# Altium PCB Insole_ver1_42.PcbDoc (part 1 of 3)
Units mm, origin at the board's own origin, x right, y up, seen from the top; angles counter-clockwise.
Board outline 154.9 x 260.57 mm, 2 copper layers (Top Layer, Bottom Layer); 254 components, 50 nets, 803 pads, 0 vias.
Unrouted connection lines stored in the file: 477.
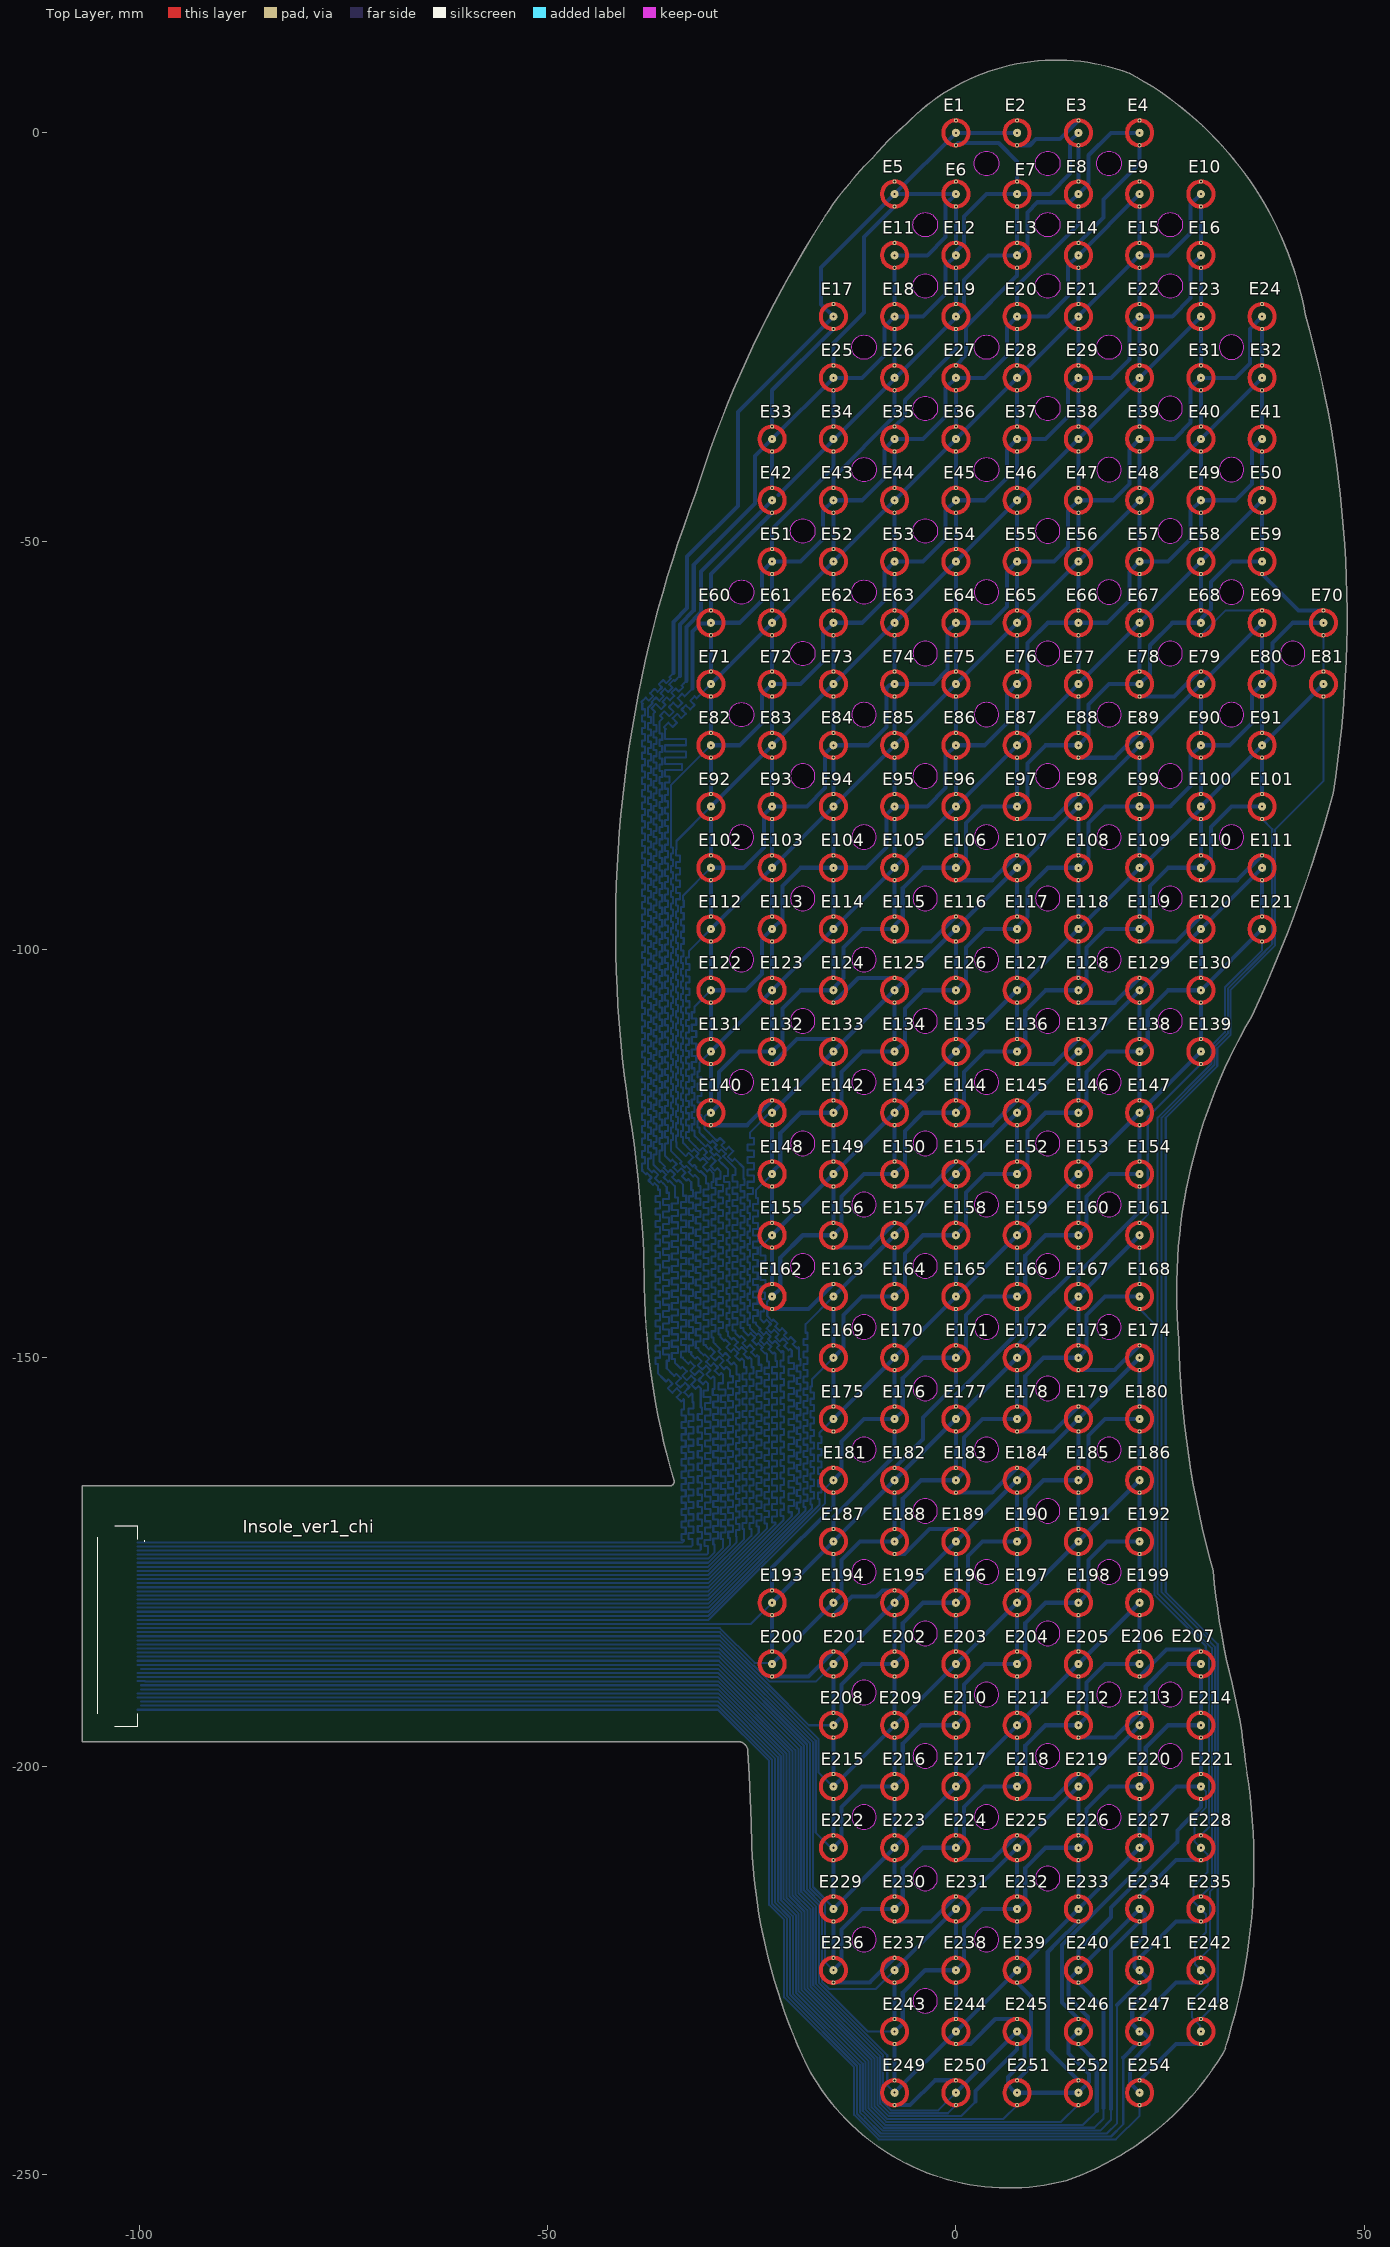
[diagram p0: Top Layer view]
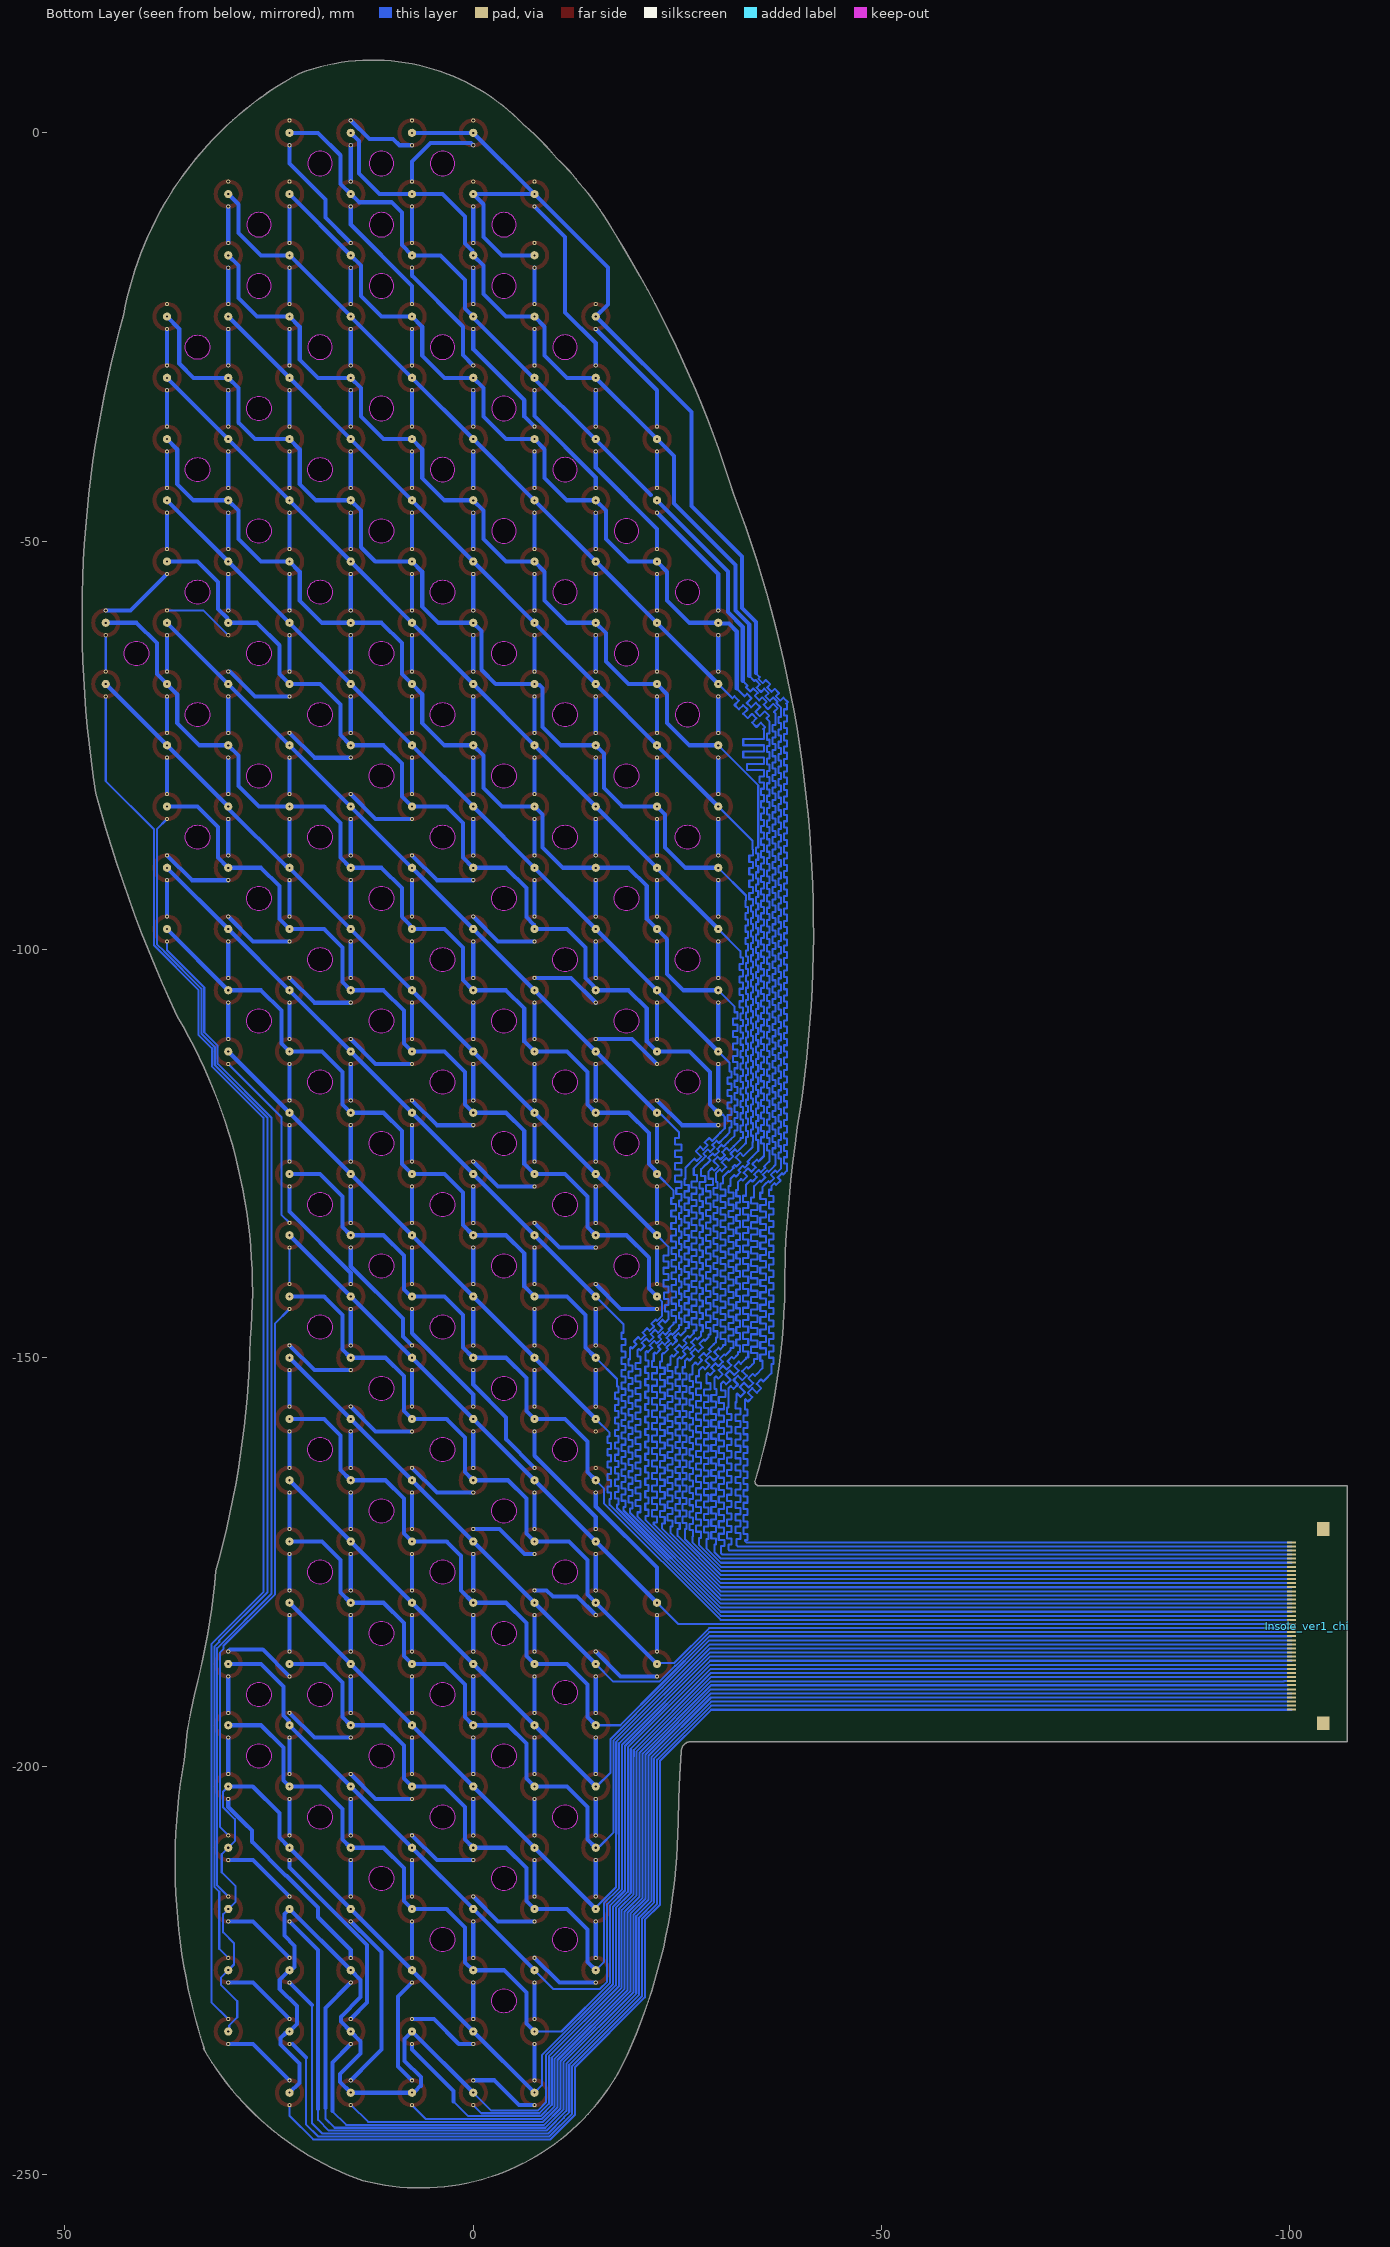
[diagram p1: Bottom Layer view, seen from below]

## Layer stack, top to bottom
Top Solder: solder mask 0.0102, Solder Resist, Dk 3.5
Top Layer: signal copper 0.0356
Dielectric 1: dielectric 0.32, FR-4, Dk 4.8
Bottom Layer: signal copper 0.0356
Bottom Solder: solder mask 0.0102, Solder Resist, Dk 3.5

## Board outline
-26.688,-197 cw(c-26.688,-198.216) -25.472,-198.216 cw(c-324.889,-216.319) -24.997,-209.744 ccw(c44.561,-206.575) -18.246,-236.636 ccw(c6.5,-223.767) 13.5,-250.767 ccw(c1.651,-216.562) 33.078,-234.527 32.957,-234.593 ccw(c-37.418,-211.967) 35.41,-199.289 ccw(c-21.756,-204.191) 33.82,-189.934 cw(c123.348,-167.938) 31.518,-176.091 cw(c141.929,-145.126) 27.287,-147.697 cw(c93.136,-141.857) 36.225,-108.222 ccw(c-115.088,-37.469) 46.211,-80.88 ccw(c-89.6,-59.362) 42.805,-22.261 ccw(c1.326,-29.86) 21.234,7.314 ccw(c12.343,-16.668) -6.147,1.004 ccw(c13.814,-22.782) -10.2,-3.097 ccw(c4.457,-19.243) -13.019,-6.2 ccw(c7.586,-24.741) -16.388,-10.827 ccw(c99.541,-84.886) -31.897,-44.287 -31.891,-44.289 ccw(c108,-97.5) -39.7,-121.7 cw(c-230.71,-148.248) -38.193,-136.988 -38.2,-137 ccw(c-1.9,-137.6) -38.158,-139.454 -38.171,-139.702 ccw(c51.015,-139.776) -34.5,-165.1 cw(c-35.05,-165.15) -35,-165.7 -107,-165.7 -107,-197
cut-out: -5.25,-198.75 ccw(c-3.75,-198.75) -3.75,-200.25 ccw(c-3.75,-198.75) -2.25,-198.75 ccw(c-3.75,-198.75) -3.75,-197.25 ccw(c-3.75,-198.75)
cut-out: -12.75,-206.25 ccw(c-11.25,-206.25) -11.25,-207.75 ccw(c-11.25,-206.25) -9.75,-206.25 ccw(c-11.25,-206.25) -11.25,-204.75 ccw(c-11.25,-206.25)
cut-out: -5.25,-228.75 ccw(c-3.75,-228.75) -3.75,-230.25 ccw(c-3.75,-228.75) -2.25,-228.75 ccw(c-3.75,-228.75) -3.75,-227.25 ccw(c-3.75,-228.75)
cut-out: -5.25,-213.75 ccw(c-3.75,-213.75) -3.75,-215.25 ccw(c-3.75,-213.75) -2.25,-213.75 ccw(c-3.75,-213.75) -3.75,-212.25 ccw(c-3.75,-213.75)
cut-out: 2.25,-221.25 ccw(c3.75,-221.25) 3.75,-222.75 ccw(c3.75,-221.25) 5.25,-221.25 ccw(c3.75,-221.25) 3.75,-219.75 ccw(c3.75,-221.25)
cut-out: 9.75,-213.75 ccw(c11.25,-213.75) 11.25,-215.25 ccw(c11.25,-213.75) 12.75,-213.75 ccw(c11.25,-213.75) 11.25,-212.25 ccw(c11.25,-213.75)
cut-out: 9.75,-198.75 ccw(c11.25,-198.75) 11.25,-200.25 ccw(c11.25,-198.75) 12.75,-198.75 ccw(c11.25,-198.75) 11.25,-197.25 ccw(c11.25,-198.75)
cut-out: 2.25,-206.25 ccw(c3.75,-206.25) 3.75,-207.75 ccw(c3.75,-206.25) 5.25,-206.25 ccw(c3.75,-206.25) 3.75,-204.75 ccw(c3.75,-206.25)
cut-out: 17.25,-206.25 ccw(c18.75,-206.25) 18.75,-207.75 ccw(c18.75,-206.25) 20.25,-206.25 ccw(c18.75,-206.25) 18.75,-204.75 ccw(c18.75,-206.25)
cut-out: 24.75,-198.75 ccw(c26.25,-198.75) 26.25,-200.25 ccw(c26.25,-198.75) 27.75,-198.75 ccw(c26.25,-198.75) 26.25,-197.25 ccw(c26.25,-198.75)
cut-out: 24.75,-191.25 ccw(c26.25,-191.25) 26.25,-192.75 ccw(c26.25,-191.25) 27.75,-191.25 ccw(c26.25,-191.25) 26.25,-189.75 ccw(c26.25,-191.25)
cut-out: 17.25,-191.25 ccw(c18.75,-191.25) 18.75,-192.75 ccw(c18.75,-191.25) 20.25,-191.25 ccw(c18.75,-191.25) 18.75,-189.75 ccw(c18.75,-191.25)
cut-out: 2.25,-191.25 ccw(c3.75,-191.25) 3.75,-192.75 ccw(c3.75,-191.25) 5.25,-191.25 ccw(c3.75,-191.25) 3.75,-189.75 ccw(c3.75,-191.25)
cut-out: 9.75,-183.75 ccw(c11.25,-183.75) 11.25,-185.25 ccw(c11.25,-183.75) 12.75,-183.75 ccw(c11.25,-183.75) 11.25,-182.25 ccw(c11.25,-183.75)
cut-out: 17.25,-176.25 ccw(c18.75,-176.25) 18.75,-177.75 ccw(c18.75,-176.25) 20.25,-176.25 ccw(c18.75,-176.25) 18.75,-174.75 ccw(c18.75,-176.25)
cut-out: -5.25,-183.75 ccw(c-3.75,-183.75) -3.75,-185.25 ccw(c-3.75,-183.75) -2.25,-183.75 ccw(c-3.75,-183.75) -3.75,-182.25 ccw(c-3.75,-183.75)
cut-out: 2.25,-176.25 ccw(c3.75,-176.25) 3.75,-177.75 ccw(c3.75,-176.25) 5.25,-176.25 ccw(c3.75,-176.25) 3.75,-174.75 ccw(c3.75,-176.25)
cut-out: -12.75,-176.25 ccw(c-11.25,-176.25) -11.25,-177.75 ccw(c-11.25,-176.25) -9.75,-176.25 ccw(c-11.25,-176.25) -11.25,-174.75 ccw(c-11.25,-176.25)
cut-out: -5.25,-168.75 ccw(c-3.75,-168.75) -3.75,-170.25 ccw(c-3.75,-168.75) -2.25,-168.75 ccw(c-3.75,-168.75) -3.75,-167.25 ccw(c-3.75,-168.75)
cut-out: 9.75,-168.75 ccw(c11.25,-168.75) 11.25,-170.25 ccw(c11.25,-168.75) 12.75,-168.75 ccw(c11.25,-168.75) 11.25,-167.25 ccw(c11.25,-168.75)
cut-out: 17.25,-161.25 ccw(c18.75,-161.25) 18.75,-162.75 ccw(c18.75,-161.25) 20.25,-161.25 ccw(c18.75,-161.25) 18.75,-159.75 ccw(c18.75,-161.25)
cut-out: 2.25,-161.25 ccw(c3.75,-161.25) 3.75,-162.75 ccw(c3.75,-161.25) 5.25,-161.25 ccw(c3.75,-161.25) 3.75,-159.75 ccw(c3.75,-161.25)
cut-out: -12.75,-161.25 ccw(c-11.25,-161.25) -11.25,-162.75 ccw(c-11.25,-161.25) -9.75,-161.25 ccw(c-11.25,-161.25) -11.25,-159.75 ccw(c-11.25,-161.25)
cut-out: -5.25,-153.75 ccw(c-3.75,-153.75) -3.75,-155.25 ccw(c-3.75,-153.75) -2.25,-153.75 ccw(c-3.75,-153.75) -3.75,-152.25 ccw(c-3.75,-153.75)
cut-out: 9.75,-153.75 ccw(c11.25,-153.75) 11.25,-155.25 ccw(c11.25,-153.75) 12.75,-153.75 ccw(c11.25,-153.75) 11.25,-152.25 ccw(c11.25,-153.75)
cut-out: 17.25,-146.25 ccw(c18.75,-146.25) 18.75,-147.75 ccw(c18.75,-146.25) 20.25,-146.25 ccw(c18.75,-146.25) 18.75,-144.75 ccw(c18.75,-146.25)
cut-out: 2.25,-146.25 ccw(c3.75,-146.25) 3.75,-147.75 ccw(c3.75,-146.25) 5.25,-146.25 ccw(c3.75,-146.25) 3.75,-144.75 ccw(c3.75,-146.25)
cut-out: -12.75,-146.25 ccw(c-11.25,-146.25) -11.25,-147.75 ccw(c-11.25,-146.25) -9.75,-146.25 ccw(c-11.25,-146.25) -11.25,-144.75 ccw(c-11.25,-146.25)
cut-out: -20.25,-138.75 ccw(c-18.75,-138.75) -18.75,-140.25 ccw(c-18.75,-138.75) -17.25,-138.75 ccw(c-18.75,-138.75) -18.75,-137.25 ccw(c-18.75,-138.75)
cut-out: -5.25,-138.75 ccw(c-3.75,-138.75) -3.75,-140.25 ccw(c-3.75,-138.75) -2.25,-138.75 ccw(c-3.75,-138.75) -3.75,-137.25 ccw(c-3.75,-138.75)
cut-out: 9.75,-138.75 ccw(c11.25,-138.75) 11.25,-140.25 ccw(c11.25,-138.75) 12.75,-138.75 ccw(c11.25,-138.75) 11.25,-137.25 ccw(c11.25,-138.75)
cut-out: 17.25,-131.25 ccw(c18.75,-131.25) 18.75,-132.75 ccw(c18.75,-131.25) 20.25,-131.25 ccw(c18.75,-131.25) 18.75,-129.75 ccw(c18.75,-131.25)
cut-out: 2.25,-131.25 ccw(c3.75,-131.25) 3.75,-132.75 ccw(c3.75,-131.25) 5.25,-131.25 ccw(c3.75,-131.25) 3.75,-129.75 ccw(c3.75,-131.25)
cut-out: -12.75,-131.25 ccw(c-11.25,-131.25) -11.25,-132.75 ccw(c-11.25,-131.25) -9.75,-131.25 ccw(c-11.25,-131.25) -11.25,-129.75 ccw(c-11.25,-131.25)
cut-out: -20.25,-123.75 ccw(c-18.75,-123.75) -18.75,-125.25 ccw(c-18.75,-123.75) -17.25,-123.75 ccw(c-18.75,-123.75) -18.75,-122.25 ccw(c-18.75,-123.75)
cut-out: -5.25,-123.75 ccw(c-3.75,-123.75) -3.75,-125.25 ccw(c-3.75,-123.75) -2.25,-123.75 ccw(c-3.75,-123.75) -3.75,-122.25 ccw(c-3.75,-123.75)
cut-out: 9.75,-123.75 ccw(c11.25,-123.75) 11.25,-125.25 ccw(c11.25,-123.75) 12.75,-123.75 ccw(c11.25,-123.75) 11.25,-122.25 ccw(c11.25,-123.75)
cut-out: 17.25,-116.25 ccw(c18.75,-116.25) 18.75,-117.75 ccw(c18.75,-116.25) 20.25,-116.25 ccw(c18.75,-116.25) 18.75,-114.75 ccw(c18.75,-116.25)
cut-out: 2.25,-116.25 ccw(c3.75,-116.25) 3.75,-117.75 ccw(c3.75,-116.25) 5.25,-116.25 ccw(c3.75,-116.25) 3.75,-114.75 ccw(c3.75,-116.25)
cut-out: -12.75,-116.25 ccw(c-11.25,-116.25) -11.25,-117.75 ccw(c-11.25,-116.25) -9.75,-116.25 ccw(c-11.25,-116.25) -11.25,-114.75 ccw(c-11.25,-116.25)
cut-out: -27.75,-116.25 ccw(c-26.25,-116.25) -26.25,-117.75 ccw(c-26.25,-116.25) -24.75,-116.25 ccw(c-26.25,-116.25) -26.25,-114.75 ccw(c-26.25,-116.25)
cut-out: -20.25,-108.75 ccw(c-18.75,-108.75) -18.75,-110.25 ccw(c-18.75,-108.75) -17.25,-108.75 ccw(c-18.75,-108.75) -18.75,-107.25 ccw(c-18.75,-108.75)
cut-out: -5.25,-108.75 ccw(c-3.75,-108.75) -3.75,-110.25 ccw(c-3.75,-108.75) -2.25,-108.75 ccw(c-3.75,-108.75) -3.75,-107.25 ccw(c-3.75,-108.75)
cut-out: 9.75,-108.75 ccw(c11.25,-108.75) 11.25,-110.25 ccw(c11.25,-108.75) 12.75,-108.75 ccw(c11.25,-108.75) 11.25,-107.25 ccw(c11.25,-108.75)
cut-out: 24.75,-108.75 ccw(c26.25,-108.75) 26.25,-110.25 ccw(c26.25,-108.75) 27.75,-108.75 ccw(c26.25,-108.75) 26.25,-107.25 ccw(c26.25,-108.75)
cut-out: 17.25,-101.25 ccw(c18.75,-101.25) 18.75,-102.75 ccw(c18.75,-101.25) 20.25,-101.25 ccw(c18.75,-101.25) 18.75,-99.75 ccw(c18.75,-101.25)
cut-out: 2.25,-101.25 ccw(c3.75,-101.25) 3.75,-102.75 ccw(c3.75,-101.25) 5.25,-101.25 ccw(c3.75,-101.25) 3.75,-99.75 ccw(c3.75,-101.25)
cut-out: -12.75,-101.25 ccw(c-11.25,-101.25) -11.25,-102.75 ccw(c-11.25,-101.25) -9.75,-101.25 ccw(c-11.25,-101.25) -11.25,-99.75 ccw(c-11.25,-101.25)
cut-out: -27.75,-101.25 ccw(c-26.25,-101.25) -26.25,-102.75 ccw(c-26.25,-101.25) -24.75,-101.25 ccw(c-26.25,-101.25) -26.25,-99.75 ccw(c-26.25,-101.25)
cut-out: -20.25,-93.75 ccw(c-18.75,-93.75) -18.75,-95.25 ccw(c-18.75,-93.75) -17.25,-93.75 ccw(c-18.75,-93.75) -18.75,-92.25 ccw(c-18.75,-93.75)
cut-out: -5.25,-93.75 ccw(c-3.75,-93.75) -3.75,-95.25 ccw(c-3.75,-93.75) -2.25,-93.75 ccw(c-3.75,-93.75) -3.75,-92.25 ccw(c-3.75,-93.75)
cut-out: 9.75,-93.75 ccw(c11.25,-93.75) 11.25,-95.25 ccw(c11.25,-93.75) 12.75,-93.75 ccw(c11.25,-93.75) 11.25,-92.25 ccw(c11.25,-93.75)
cut-out: 24.75,-93.75 ccw(c26.25,-93.75) 26.25,-95.25 ccw(c26.25,-93.75) 27.75,-93.75 ccw(c26.25,-93.75) 26.25,-92.25 ccw(c26.25,-93.75)
cut-out: 32.25,-86.25 ccw(c33.75,-86.25) 33.75,-87.75 ccw(c33.75,-86.25) 35.25,-86.25 ccw(c33.75,-86.25) 33.75,-84.75 ccw(c33.75,-86.25)
cut-out: 17.25,-86.25 ccw(c18.75,-86.25) 18.75,-87.75 ccw(c18.75,-86.25) 20.25,-86.25 ccw(c18.75,-86.25) 18.75,-84.75 ccw(c18.75,-86.25)
cut-out: 2.25,-86.25 ccw(c3.75,-86.25) 3.75,-87.75 ccw(c3.75,-86.25) 5.25,-86.25 ccw(c3.75,-86.25) 3.75,-84.75 ccw(c3.75,-86.25)
cut-out: -5.25,-78.75 ccw(c-3.75,-78.75) -3.75,-80.25 ccw(c-3.75,-78.75) -2.25,-78.75 ccw(c-3.75,-78.75) -3.75,-77.25 ccw(c-3.75,-78.75)
cut-out: -12.75,-86.25 ccw(c-11.25,-86.25) -11.25,-87.75 ccw(c-11.25,-86.25) -9.75,-86.25 ccw(c-11.25,-86.25) -11.25,-84.75 ccw(c-11.25,-86.25)
cut-out: -27.75,-86.25 ccw(c-26.25,-86.25) -26.25,-87.75 ccw(c-26.25,-86.25) -24.75,-86.25 ccw(c-26.25,-86.25) -26.25,-84.75 ccw(c-26.25,-86.25)
cut-out: -20.25,-78.75 ccw(c-18.75,-78.75) -18.75,-80.25 ccw(c-18.75,-78.75) -17.25,-78.75 ccw(c-18.75,-78.75) -18.75,-77.25 ccw(c-18.75,-78.75)
cut-out: -26.25,-72.75 cw(c-26.25,-71.25) -27.75,-71.25 cw(c-26.25,-71.25) -26.25,-69.75 cw(c-26.25,-71.25) -24.75,-71.25 cw(c-26.25,-71.25)
cut-out: -26.25,-57.75 cw(c-26.25,-56.25) -27.75,-56.25 cw(c-26.25,-56.25) -26.25,-54.75 cw(c-26.25,-56.25) -24.75,-56.25 cw(c-26.25,-56.25)
cut-out: -12.75,-71.25 ccw(c-11.25,-71.25) -11.25,-72.75 ccw(c-11.25,-71.25) -9.75,-71.25 ccw(c-11.25,-71.25) -11.25,-69.75 ccw(c-11.25,-71.25)
cut-out: 32.25,-71.25 ccw(c33.75,-71.25) 33.75,-72.75 ccw(c33.75,-71.25) 35.25,-71.25 ccw(c33.75,-71.25) 33.75,-69.75 ccw(c33.75,-71.25)
cut-out: 39.75,-63.75 ccw(c41.25,-63.75) 41.25,-65.25 ccw(c41.25,-63.75) 42.75,-63.75 ccw(c41.25,-63.75) 41.25,-62.25 ccw(c41.25,-63.75)
cut-out: 24.75,-63.75 ccw(c26.25,-63.75) 26.25,-65.25 ccw(c26.25,-63.75) 27.75,-63.75 ccw(c26.25,-63.75) 26.25,-62.25 ccw(c26.25,-63.75)
cut-out: -5.25,-63.75 ccw(c-3.75,-63.75) -3.75,-65.25 ccw(c-3.75,-63.75) -2.25,-63.75 ccw(c-3.75,-63.75) -3.75,-62.25 ccw(c-3.75,-63.75)
cut-out: -18.75,-65.25 cw(c-18.75,-63.75) -20.25,-63.75 cw(c-18.75,-63.75) -18.75,-62.25 cw(c-18.75,-63.75) -17.25,-63.75 cw(c-18.75,-63.75)
cut-out: -11.25,-57.75 cw(c-11.25,-56.25) -12.75,-56.25 cw(c-11.25,-56.25) -11.25,-54.75 cw(c-11.25,-56.25) -9.75,-56.25 cw(c-11.25,-56.25)
cut-out: 2.25,-56.25 ccw(c3.75,-56.25) 3.75,-57.75 ccw(c3.75,-56.25) 5.25,-56.25 ccw(c3.75,-56.25) 3.75,-54.75 ccw(c3.75,-56.25)
cut-out: 9.75,-48.75 ccw(c11.25,-48.75) 11.25,-50.25 ccw(c11.25,-48.75) 12.75,-48.75 ccw(c11.25,-48.75) 11.25,-47.25 ccw(c11.25,-48.75)
cut-out: -3.75,-50.25 cw(c-3.75,-48.75) -5.25,-48.75 cw(c-3.75,-48.75) -3.75,-47.25 cw(c-3.75,-48.75) -2.25,-48.75 cw(c-3.75,-48.75)
cut-out: -18.75,-50.25 cw(c-18.75,-48.75) -20.25,-48.75 cw(c-18.75,-48.75) -18.75,-47.25 cw(c-18.75,-48.75) -17.25,-48.75 cw(c-18.75,-48.75)
cut-out: -11.25,-42.75 cw(c-11.25,-41.25) -12.75,-41.25 cw(c-11.25,-41.25) -11.25,-39.75 cw(c-11.25,-41.25) -9.75,-41.25 cw(c-11.25,-41.25)
cut-out: 3.75,-42.75 cw(c3.75,-41.25) 2.25,-41.25 cw(c3.75,-41.25) 3.75,-39.75 cw(c3.75,-41.25) 5.25,-41.25 cw(c3.75,-41.25)
cut-out: 17.25,-41.25 ccw(c18.75,-41.25) 18.75,-42.75 ccw(c18.75,-41.25) 20.25,-41.25 ccw(c18.75,-41.25) 18.75,-39.75 ccw(c18.75,-41.25)
cut-out: 32.25,-41.25 ccw(c33.75,-41.25) 33.75,-42.75 ccw(c33.75,-41.25) 35.25,-41.25 ccw(c33.75,-41.25) 33.75,-39.75 ccw(c33.75,-41.25)
cut-out: 24.75,-48.75 ccw(c26.25,-48.75) 26.25,-50.25 ccw(c26.25,-48.75) 27.75,-48.75 ccw(c26.25,-48.75) 26.25,-47.25 ccw(c26.25,-48.75)
cut-out: 32.25,-56.25 ccw(c33.75,-56.25) 33.75,-57.75 ccw(c33.75,-56.25) 35.25,-56.25 ccw(c33.75,-56.25) 33.75,-54.75 ccw(c33.75,-56.25)
cut-out: 17.25,-56.25 ccw(c18.75,-56.25) 18.75,-57.75 ccw(c18.75,-56.25) 20.25,-56.25 ccw(c18.75,-56.25) 18.75,-54.75 ccw(c18.75,-56.25)
cut-out: 9.75,-63.75 ccw(c11.25,-63.75) 11.25,-65.25 ccw(c11.25,-63.75) 12.75,-63.75 ccw(c11.25,-63.75) 11.25,-62.25 ccw(c11.25,-63.75)
cut-out: 2.25,-71.25 ccw(c3.75,-71.25) 3.75,-72.75 ccw(c3.75,-71.25) 5.25,-71.25 ccw(c3.75,-71.25) 3.75,-69.75 ccw(c3.75,-71.25)
cut-out: 9.75,-78.75 ccw(c11.25,-78.75) 11.25,-80.25 ccw(c11.25,-78.75) 12.75,-78.75 ccw(c11.25,-78.75) 11.25,-77.25 ccw(c11.25,-78.75)
cut-out: 24.75,-78.75 ccw(c26.25,-78.75) 26.25,-80.25 ccw(c26.25,-78.75) 27.75,-78.75 ccw(c26.25,-78.75) 26.25,-77.25 ccw(c26.25,-78.75)
cut-out: 17.25,-71.25 ccw(c18.75,-71.25) 18.75,-72.75 ccw(c18.75,-71.25) 20.25,-71.25 ccw(c18.75,-71.25) 18.75,-69.75 ccw(c18.75,-71.25)
cut-out: -12.75,-221.25 ccw(c-11.25,-221.25) -11.25,-222.75 ccw(c-11.25,-221.25) -9.75,-221.25 ccw(c-11.25,-221.25) -11.25,-219.75 ccw(c-11.25,-221.25)
cut-out: 24.75,-33.75 ccw(c26.25,-33.75) 26.25,-35.25 ccw(c26.25,-33.75) 27.75,-33.75 ccw(c26.25,-33.75) 26.25,-32.25 ccw(c26.25,-33.75)
cut-out: 11.25,-35.25 cw(c11.25,-33.75) 9.75,-33.75 cw(c11.25,-33.75) 11.25,-32.25 cw(c11.25,-33.75) 12.75,-33.75 cw(c11.25,-33.75)
cut-out: -3.75,-35.25 cw(c-3.75,-33.75) -5.25,-33.75 cw(c-3.75,-33.75) -3.75,-32.25 cw(c-3.75,-33.75) -2.25,-33.75 cw(c-3.75,-33.75)
cut-out: -11.25,-27.75 cw(c-11.25,-26.25) -12.75,-26.25 cw(c-11.25,-26.25) -11.25,-24.75 cw(c-11.25,-26.25) -9.75,-26.25 cw(c-11.25,-26.25)
cut-out: 3.75,-27.75 cw(c3.75,-26.25) 2.25,-26.25 cw(c3.75,-26.25) 3.75,-24.75 cw(c3.75,-26.25) 5.25,-26.25 cw(c3.75,-26.25)
cut-out: 18.75,-27.75 cw(c18.75,-26.25) 17.25,-26.25 cw(c18.75,-26.25) 18.75,-24.75 cw(c18.75,-26.25) 20.25,-26.25 cw(c18.75,-26.25)
cut-out: 32.25,-26.25 ccw(c33.75,-26.25) 33.75,-27.75 ccw(c33.75,-26.25) 35.25,-26.25 ccw(c33.75,-26.25) 33.75,-24.75 ccw(c33.75,-26.25)
cut-out: 26.25,-20.25 cw(c26.25,-18.75) 24.75,-18.75 cw(c26.25,-18.75) 26.25,-17.25 cw(c26.25,-18.75) 27.75,-18.75 cw(c26.25,-18.75)
cut-out: -3.75,-20.25 cw(c-3.75,-18.75) -5.25,-18.75 cw(c-3.75,-18.75) -3.75,-17.25 cw(c-3.75,-18.75) -2.25,-18.75 cw(c-3.75,-18.75)
cut-out: 11.25,-20.25 cw(c11.25,-18.75) 9.75,-18.75 cw(c11.25,-18.75) 11.25,-17.25 cw(c11.25,-18.75) 12.75,-18.75 cw(c11.25,-18.75)
cut-out: 11.25,-12.75 cw(c11.25,-11.25) 9.75,-11.25 cw(c11.25,-11.25) 11.25,-9.75 cw(c11.25,-11.25) 12.75,-11.25 cw(c11.25,-11.25)
cut-out: 26.25,-12.75 cw(c26.25,-11.25) 24.75,-11.25 cw(c26.25,-11.25) 26.25,-9.75 cw(c26.25,-11.25) 27.75,-11.25 cw(c26.25,-11.25)
cut-out: 18.75,-5.25 cw(c18.75,-3.75) 17.25,-3.75 cw(c18.75,-3.75) 18.75,-2.25 cw(c18.75,-3.75) 20.25,-3.75 cw(c18.75,-3.75)
cut-out: 11.25,-5.25 cw(c11.25,-3.75) 9.75,-3.75 cw(c11.25,-3.75) 11.25,-2.25 cw(c11.25,-3.75) 12.75,-3.75 cw(c11.25,-3.75)
cut-out: -3.75,-12.75 cw(c-3.75,-11.25) -5.25,-11.25 cw(c-3.75,-11.25) -3.75,-9.75 cw(c-3.75,-11.25) -2.25,-11.25 cw(c-3.75,-11.25)
cut-out: -12.75,-191 ccw(c-11.25,-191) -11.25,-192.5 ccw(c-11.25,-191) -9.75,-191 ccw(c-11.25,-191) -11.25,-189.5 ccw(c-11.25,-191)
cut-out: -12.75,-191 ccw(c-11.25,-191) -11.25,-192.5 ccw(c-11.25,-191) -9.75,-191 ccw(c-11.25,-191) -11.25,-189.5 ccw(c-11.25,-191)
cut-out: 3.75,-5.25 cw(c3.75,-3.75) 2.25,-3.75 cw(c3.75,-3.75) 3.75,-2.25 cw(c3.75,-3.75) 5.25,-3.75 cw(c3.75,-3.75)

## Design rules (kind name [scope] priority, off if disabled: settings)
Clearance [All] p1: gap=0.254 ignorepadtopadclearanceinfootprint=FALSE except(0: Arc-Hole Track-Hole SMDPad-Hole THPad-Hole Via-Hole Fill-Hole Poly-Hole Region-Hole Text-Hole; 0.102: Arc-Arc Arc-Track Track-Track)
DiffPairsRouting [All] p1: maxlimit=0.254 minlimit=0.254 mostfreqgap=0.254 toplayer_minwidth=0.381 toplayer_maxwidth=0.381 toplayer_prefwidth=0.381 bottomlayer_minwidth=0.381 bottomlayer_maxwidth=0.381 bottomlayer_prefwidth=0.381 substack1={6D9DD50E-99D7-4FCE-B177-F3C0DD92A880} toplayer_{6d9dd50e-99d7-4fce-b177-f3c0dd92a880}_minwidth=0.381 toplayer_{6d9dd50e-99d7-4fce-b177-f3c0dd92a880}_maxwidth=0.381 toplayer_{6d9dd50e-99d7-4fce-b177-f3c0dd92a880}_prefwidth=0.381 bottomlayer_{6d9dd50e-99d7-4fce-b177-f3c0dd92a880}_minwidth=0.381 bottomlayer_{6d9dd50e-99d7-4fce-b177-f3c0dd92a880}_maxwidth=0.381 bottomlayer_{6d9dd50e-99d7-4fce-b177-f3c0dd92a880}_prefwidth=0.381 maxuncoupledlength=12.7
PolygonConnect [All] p1: connectstyle=Relief reliefconductorwidth=0.254 reliefentries=4 polygonreliefangle="90 Angle" airgapwidth=0.254
RoutingVias [All] p1: holewidth=0.711 width=1.27 viastyle="Through Hole" minholewidth=0.711 minwidth=1.27 maxholewidth=0.711 maxwidth=1.27
SolderMaskExpansion [All] p1: expansion=0.102 istentingtop=FALSE
Width [All] p1: maxlimit=0.254 minlimit=0.254 preferedwidth=0.254 substack1={6D9DD50E-99D7-4FCE-B177-F3C0DD92A880}
29 further rules are at their usual default settings.

## Classes and differential pairs
net class ROUTE: Col1 Col2 Col3 Col4 Col5 Col6 Col7 Col8 Col9 Col10 Col11 Col12 Col13 Col14 Col15 Col16 Col17 Col18 Row1 Row2 Row3 Row4 Row5 Row6 Row7 Row8 Row9 Row10 Row11 Row12 Row13 Row14 Row15 Row16 Row17 Row18 Row19 Row20 Row21 Row22 Row23 Row24 Row25 Row26 Row27 Row28 Row29 Row30 Row31 Row32

## Components (designator, comment, footprint, x,y, rotation, side; value= is the part's Value field where it differs from the comment)
E1 "Insole_electrode_v1" insole_electrode_v1 0,0 r0 top
E2 "Insole_electrode_v1" insole_electrode_v1 7.5,0 r0 top
E3 "Insole_electrode_v1" insole_electrode_v1 15,0 r0 top
E4 "Insole_electrode_v1" insole_electrode_v1 22.5,0 r0 top
E5 "Insole_electrode_v1" insole_electrode_v1 -7.5,-7.5 r0 top
E6 "Insole_electrode_v1" insole_electrode_v1 0,-7.5 r0 top
E7 "Insole_electrode_v1" insole_electrode_v1 7.5,-7.5 r0 top
E8 "Insole_electrode_v1" insole_electrode_v1 15,-7.5 r0 top
E9 "Insole_electrode_v1" insole_electrode_v1 22.5,-7.5 r0 top
E10 "Insole_electrode_v1" insole_electrode_v1 30,-7.5 r0 top
E11 "Insole_electrode_v1" insole_electrode_v1 -7.5,-15 r0 top
E12 "Insole_electrode_v1" insole_electrode_v1 0,-15 r0 top
E13 "Insole_electrode_v1" insole_electrode_v1 7.5,-15 r0 top
E14 "Insole_electrode_v1" insole_electrode_v1 15,-15 r0 top
E15 "Insole_electrode_v1" insole_electrode_v1 22.5,-15 r0 top
E16 "Insole_electrode_v1" insole_electrode_v1 30,-15 r0 top
E17 "Insole_electrode_v1" insole_electrode_v1 -15,-22.5 r0 top
E18 "Insole_electrode_v1" insole_electrode_v1 -7.5,-22.5 r0 top
E19 "Insole_electrode_v1" insole_electrode_v1 0,-22.5 r0 top
E20 "Insole_electrode_v1" insole_electrode_v1 7.5,-22.5 r0 top
E21 "Insole_electrode_v1" insole_electrode_v1 15,-22.5 r0 top
E22 "Insole_electrode_v1" insole_electrode_v1 22.5,-22.5 r0 top
E23 "Insole_electrode_v1" insole_electrode_v1 30,-22.5 r0 top
E24 "Insole_electrode_v1" insole_electrode_v1 37.5,-22.5 r0 top
E25 "Insole_electrode_v1" insole_electrode_v1 -15,-30 r0 top
E26 "Insole_electrode_v1" insole_electrode_v1 -7.5,-30 r0 top
E27 "Insole_electrode_v1" insole_electrode_v1 0,-30 r0 top
E28 "Insole_electrode_v1" insole_electrode_v1 7.5,-30 r0 top
E29 "Insole_electrode_v1" insole_electrode_v1 15,-30 r0 top
E30 "Insole_electrode_v1" insole_electrode_v1 22.5,-30 r0 top
E31 "Insole_electrode_v1" insole_electrode_v1 30,-30 r0 top
E32 "Insole_electrode_v1" insole_electrode_v1 37.5,-30 r0 top
E33 "Insole_electrode_v1" insole_electrode_v1 -22.5,-37.5 r0 top
E34 "Insole_electrode_v1" insole_electrode_v1 -15,-37.5 r0 top
E35 "Insole_electrode_v1" insole_electrode_v1 -7.5,-37.5 r0 top
E36 "Insole_electrode_v1" insole_electrode_v1 0,-37.5 r0 top
E37 "Insole_electrode_v1" insole_electrode_v1 7.5,-37.5 r0 top
E38 "Insole_electrode_v1" insole_electrode_v1 15,-37.5 r0 top
E39 "Insole_electrode_v1" insole_electrode_v1 22.5,-37.5 r0 top
E40 "Insole_electrode_v1" insole_electrode_v1 30,-37.5 r0 top
E41 "Insole_electrode_v1" insole_electrode_v1 37.5,-37.5 r0 top
E42 "Insole_electrode_v1" insole_electrode_v1 -22.5,-45 r0 top
E43 "Insole_electrode_v1" insole_electrode_v1 -15,-45 r0 top
E44 "Insole_electrode_v1" insole_electrode_v1 -7.5,-45 r0 top
E45 "Insole_electrode_v1" insole_electrode_v1 0,-45 r0 top
E46 "Insole_electrode_v1" insole_electrode_v1 7.5,-45 r0 top
E47 "Insole_electrode_v1" insole_electrode_v1 15,-45 r0 top
E48 "Insole_electrode_v1" insole_electrode_v1 22.5,-45 r0 top
E49 "Insole_electrode_v1" insole_electrode_v1 30,-45 r0 top
E50 "Insole_electrode_v1" insole_electrode_v1 37.5,-45 r0 top
E51 "Insole_electrode_v1" insole_electrode_v1 -22.5,-52.5 r0 top
E52 "Insole_electrode_v1" insole_electrode_v1 -15,-52.5 r0 top
E53 "Insole_electrode_v1" insole_electrode_v1 -7.5,-52.5 r0 top
E54 "Insole_electrode_v1" insole_electrode_v1 0,-52.5 r0 top
E55 "Insole_electrode_v1" insole_electrode_v1 7.5,-52.5 r0 top
E56 "Insole_electrode_v1" insole_electrode_v1 15,-52.5 r0 top
E57 "Insole_electrode_v1" insole_electrode_v1 22.5,-52.5 r0 top
E58 "Insole_electrode_v1" insole_electrode_v1 30,-52.5 r0 top
E59 "Insole_electrode_v1" insole_electrode_v1 37.5,-52.5 r0 top
E60 "Insole_electrode_v1" insole_electrode_v1 -30,-60 r0 top
E61 "Insole_electrode_v1" insole_electrode_v1 -22.5,-60 r0 top
E62 "Insole_electrode_v1" insole_electrode_v1 -15,-60 r0 top
E63 "Insole_electrode_v1" insole_electrode_v1 -7.5,-60 r0 top
E64 "Insole_electrode_v1" insole_electrode_v1 0,-60 r0 top
E65 "Insole_electrode_v1" insole_electrode_v1 7.5,-60 r0 top
E66 "Insole_electrode_v1" insole_electrode_v1 15,-60 r0 top
E67 "Insole_electrode_v1" insole_electrode_v1 22.5,-60 r0 top
E68 "Insole_electrode_v1" insole_electrode_v1 30,-60 r0 top
E69 "Insole_electrode_v1" insole_electrode_v1 37.5,-60 r0 top
E70 "Insole_electrode_v1" insole_electrode_v1 45,-60 r0 top
E71 "Insole_electrode_v1" insole_electrode_v1 -30,-67.5 r0 top
E72 "Insole_electrode_v1" insole_electrode_v1 -22.5,-67.5 r0 top
E73 "Insole_electrode_v1" insole_electrode_v1 -15,-67.5 r0 top
E74 "Insole_electrode_v1" insole_electrode_v1 -7.5,-67.5 r0 top
E75 "Insole_electrode_v1" insole_electrode_v1 0,-67.5 r0 top
E76 "Insole_electrode_v1" insole_electrode_v1 7.5,-67.5 r0 top
E77 "Insole_electrode_v1" insole_electrode_v1 15,-67.5 r0 top
E78 "Insole_electrode_v1" insole_electrode_v1 22.5,-67.5 r0 top
E79 "Insole_electrode_v1" insole_electrode_v1 30,-67.5 r0 top
E80 "Insole_electrode_v1" insole_electrode_v1 37.5,-67.5 r0 top
E81 "Insole_electrode_v1" insole_electrode_v1 45,-67.5 r0 top
E82 "Insole_electrode_v1" insole_electrode_v1 -30,-75 r0 top
E83 "Insole_electrode_v1" insole_electrode_v1 -22.5,-75 r0 top
E84 "Insole_electrode_v1" insole_electrode_v1 -15,-75 r0 top
E85 "Insole_electrode_v1" insole_electrode_v1 -7.5,-75 r0 top
E86 "Insole_electrode_v1" insole_electrode_v1 0,-75 r0 top
E87 "Insole_electrode_v1" insole_electrode_v1 7.5,-75 r0 top
E88 "Insole_electrode_v1" insole_electrode_v1 15,-75 r0 top
E89 "Insole_electrode_v1" insole_electrode_v1 22.5,-75 r0 top
E90 "Insole_electrode_v1" insole_electrode_v1 30,-75 r0 top
E91 "Insole_electrode_v1" insole_electrode_v1 37.5,-75 r0 top
E92 "Insole_electrode_v1" insole_electrode_v1 -30,-82.5 r0 top
E93 "Insole_electrode_v1" insole_electrode_v1 -22.5,-82.5 r0 top
E94 "Insole_electrode_v1" insole_electrode_v1 -15,-82.5 r0 top
E95 "Insole_electrode_v1" insole_electrode_v1 -7.5,-82.5 r0 top
E96 "Insole_electrode_v1" insole_electrode_v1 0,-82.5 r0 top
E97 "Insole_electrode_v1" insole_electrode_v1 7.5,-82.5 r0 top
E98 "Insole_electrode_v1" insole_electrode_v1 15,-82.5 r0 top
E99 "Insole_electrode_v1" insole_electrode_v1 22.5,-82.5 r0 top
E100 "Insole_electrode_v1" insole_electrode_v1 30,-82.5 r0 top
E101 "Insole_electrode_v1" insole_electrode_v1 37.5,-82.5 r0 top
E102 "Insole_electrode_v1" insole_electrode_v1 -30,-90 r0 top
E103 "Insole_electrode_v1" insole_electrode_v1 -22.5,-90 r0 top
E104 "Insole_electrode_v1" insole_electrode_v1 -15,-90 r0 top
E105 "Insole_electrode_v1" insole_electrode_v1 -7.5,-90 r0 top
E106 "Insole_electrode_v1" insole_electrode_v1 0,-90 r0 top
E107 "Insole_electrode_v1" insole_electrode_v1 7.5,-90 r0 top
E108 "Insole_electrode_v1" insole_electrode_v1 15,-90 r0 top
E109 "Insole_electrode_v1" insole_electrode_v1 22.5,-90 r0 top
E110 "Insole_electrode_v1" insole_electrode_v1 30,-90 r0 top
E111 "Insole_electrode_v1" insole_electrode_v1 37.5,-90 r0 top
E112 "Insole_electrode_v1" insole_electrode_v1 -30,-97.5 r0 top
E113 "Insole_electrode_v1" insole_electrode_v1 -22.5,-97.5 r0 top
E114 "Insole_electrode_v1" insole_electrode_v1 -15,-97.5 r0 top
E115 "Insole_electrode_v1" insole_electrode_v1 -7.5,-97.5 r0 top
E116 "Insole_electrode_v1" insole_electrode_v1 0,-97.5 r0 top
E117 "Insole_electrode_v1" insole_electrode_v1 7.5,-97.5 r0 top
E118 "Insole_electrode_v1" insole_electrode_v1 15,-97.5 r0 top
E119 "Insole_electrode_v1" insole_electrode_v1 22.5,-97.5 r0 top
E120 "Insole_electrode_v1" insole_electrode_v1 30,-97.5 r0 top
E121 "Insole_electrode_v1" insole_electrode_v1 37.5,-97.5 r0 top
E122 "Insole_electrode_v1" insole_electrode_v1 -30,-105 r0 top
E123 "Insole_electrode_v1" insole_electrode_v1 -22.5,-105 r0 top
E124 "Insole_electrode_v1" insole_electrode_v1 -15,-105 r0 top
E125 "Insole_electrode_v1" insole_electrode_v1 -7.5,-105 r0 top
E126 "Insole_electrode_v1" insole_electrode_v1 0,-105 r0 top
E127 "Insole_electrode_v1" insole_electrode_v1 7.5,-105 r0 top
E128 "Insole_electrode_v1" insole_electrode_v1 15,-105 r0 top
E129 "Insole_electrode_v1" insole_electrode_v1 22.5,-105 r0 top
E130 "Insole_electrode_v1" insole_electrode_v1 30,-105 r0 top
E131 "Insole_electrode_v1" insole_electrode_v1 -30,-112.5 r0 top
E132 "Insole_electrode_v1" insole_electrode_v1 -22.5,-112.5 r0 top
E133 "Insole_electrode_v1" insole_electrode_v1 -15,-112.5 r0 top
E134 "Insole_electrode_v1" insole_electrode_v1 -7.5,-112.5 r0 top
E135 "Insole_electrode_v1" insole_electrode_v1 0,-112.5 r0 top
E136 "Insole_electrode_v1" insole_electrode_v1 7.5,-112.5 r0 top
E137 "Insole_electrode_v1" insole_electrode_v1 15,-112.5 r0 top
E138 "Insole_electrode_v1" insole_electrode_v1 22.5,-112.5 r0 top
E139 "Insole_electrode_v1" insole_electrode_v1 30,-112.5 r0 top
E140 "Insole_electrode_v1" insole_electrode_v1 -30,-120 r0 top
E141 "Insole_electrode_v1" insole_electrode_v1 -22.5,-120 r0 top
E142 "Insole_electrode_v1" insole_electrode_v1 -15,-120 r0 top
E143 "Insole_electrode_v1" insole_electrode_v1 -7.5,-120 r0 top
E144 "Insole_electrode_v1" insole_electrode_v1 0,-120 r0 top
E145 "Insole_electrode_v1" insole_electrode_v1 7.5,-120 r0 top
E146 "Insole_electrode_v1" insole_electrode_v1 15,-120 r0 top
E147 "Insole_electrode_v1" insole_electrode_v1 22.5,-120 r0 top
E148 "Insole_electrode_v1" insole_electrode_v1 -22.5,-127.5 r0 top
E149 "Insole_electrode_v1" insole_electrode_v1 -15,-127.5 r0 top
E150 "Insole_electrode_v1" insole_electrode_v1 -7.5,-127.5 r0 top
E151 "Insole_electrode_v1" insole_electrode_v1 0,-127.5 r0 top
E152 "Insole_electrode_v1" insole_electrode_v1 7.5,-127.5 r0 top
E153 "Insole_electrode_v1" insole_electrode_v1 15,-127.5 r0 top
E154 "Insole_electrode_v1" insole_electrode_v1 22.5,-127.5 r0 top
E155 "Insole_electrode_v1" insole_electrode_v1 -22.5,-135 r0 top
E156 "Insole_electrode_v1" insole_electrode_v1 -15,-135 r0 top
E157 "Insole_electrode_v1" insole_electrode_v1 -7.5,-135 r0 top
E158 "Insole_electrode_v1" insole_electrode_v1 0,-135 r0 top
E159 "Insole_electrode_v1" insole_electrode_v1 7.5,-135 r0 top
E160 "Insole_electrode_v1" insole_electrode_v1 15,-135 r0 top
E161 "Insole_electrode_v1" insole_electrode_v1 22.5,-135 r0 top
E162 "Insole_electrode_v1" insole_electrode_v1 -22.5,-142.5 r0 top (schematic designator E271)
E163 "Insole_electrode_v1" insole_electrode_v1 -15,-142.5 r0 top
E164 "Insole_electrode_v1" insole_electrode_v1 -7.5,-142.5 r0 top
E165 "Insole_electrode_v1" insole_electrode_v1 0,-142.5 r0 top
E166 "Insole_electrode_v1" insole_electrode_v1 7.5,-142.5 r0 top
E167 "Insole_electrode_v1" insole_electrode_v1 15,-142.5 r0 top
E168 "Insole_electrode_v1" insole_electrode_v1 22.5,-142.5 r0 top
E169 "Insole_electrode_v1" insole_electrode_v1 -15,-150 r0 top (schematic designator E170)
E170 "Insole_electrode_v1" insole_electrode_v1 -7.5,-150 r0 top (schematic designator E171)
E171 "Insole_electrode_v1" insole_electrode_v1 0,-150 r0 top (schematic designator E172)
E172 "Insole_electrode_v1" insole_electrode_v1 7.5,-150 r0 top (schematic designator E173)
E173 "Insole_electrode_v1" insole_electrode_v1 15,-150 r0 top (schematic designator E174)
E174 "Insole_electrode_v1" insole_electrode_v1 22.5,-150 r0 top (schematic designator E175)
E175 "Insole_electrode_v1" insole_electrode_v1 -15,-157.5 r0 top (schematic designator E176)
E176 "Insole_electrode_v1" insole_electrode_v1 -7.5,-157.5 r0 top (schematic designator E177)
E177 "Insole_electrode_v1" insole_electrode_v1 0,-157.5 r0 top (schematic designator E178)
E178 "Insole_electrode_v1" insole_electrode_v1 7.5,-157.5 r0 top (schematic designator E179)
E179 "Insole_electrode_v1" insole_electrode_v1 15,-157.5 r0 top (schematic designator E180)
E180 "Insole_electrode_v1" insole_electrode_v1 22.5,-157.5 r0 top (schematic designator E181)
E181 "Insole_electrode_v1" insole_electrode_v1 -15,-165 r0 top (schematic designator E182)
E182 "Insole_electrode_v1" insole_electrode_v1 -7.5,-165 r0 top (schematic designator E183)
E183 "Insole_electrode_v1" insole_electrode_v1 0,-165 r0 top (schematic designator E184)
E184 "Insole_electrode_v1" insole_electrode_v1 7.5,-165 r0 top (schematic designator E185)
E185 "Insole_electrode_v1" insole_electrode_v1 15,-165 r0 top (schematic designator E186)
E186 "Insole_electrode_v1" insole_electrode_v1 22.5,-165 r0 top (schematic designator E187)
E187 "Insole_electrode_v1" insole_electrode_v1 -15,-172.5 r0 top (schematic designator E189)
E188 "Insole_electrode_v1" insole_electrode_v1 -7.5,-172.5 r0 top (schematic designator E190)
E189 "Insole_electrode_v1" insole_electrode_v1 0,-172.5 r0 top (schematic designator E191)
E190 "Insole_electrode_v1" insole_electrode_v1 7.5,-172.5 r0 top (schematic designator E192)
E191 "Insole_electrode_v1" insole_electrode_v1 15,-172.5 r0 top (schematic designator E193)
E192 "Insole_electrode_v1" insole_electrode_v1 22.5,-172.5 r0 top (schematic designator E194)
E193 "Insole_electrode_v1" insole_electrode_v1 -22.5,-180 r0 top (schematic designator E195)
E194 "Insole_electrode_v1" insole_electrode_v1 -15,-180 r0 top (schematic designator E196)
E195 "Insole_electrode_v1" insole_electrode_v1 -7.5,-180 r0 top (schematic designator E197)
E196 "Insole_electrode_v1" insole_electrode_v1 0,-180 r0 top (schematic designator E198)
E197 "Insole_electrode_v1" insole_electrode_v1 7.5,-180 r0 top (schematic designator E199)
E198 "Insole_electrode_v1" insole_electrode_v1 15,-180 r0 top (schematic designator E200)
E199 "Insole_electrode_v1" insole_electrode_v1 22.5,-180 r0 top (schematic designator E201)
E200 "Insole_electrode_v1" insole_electrode_v1 -22.5,-187.5 r0 top (schematic designator E202)
E201 "Insole_electrode_v1" insole_electrode_v1 -15,-187.5 r0 top (schematic designator E203)
E202 "Insole_electrode_v1" insole_electrode_v1 -7.5,-187.5 r0 top (schematic designator E204)
E203 "Insole_electrode_v1" insole_electrode_v1 0,-187.5 r0 top (schematic designator E205)
E204 "Insole_electrode_v1" insole_electrode_v1 7.5,-187.5 r0 top (schematic designator E206)
E205 "Insole_electrode_v1" insole_electrode_v1 15,-187.5 r0 top (schematic designator E207)
E206 "Insole_electrode_v1" insole_electrode_v1 22.5,-187.5 r0 top (schematic designator E208)
E207 "Insole_electrode_v1" insole_electrode_v1 30,-187.5 r0 top (schematic designator E209)
E208 "Insole_electrode_v1" insole_electrode_v1 -15,-195 r0 top (schematic designator E210)
E209 "Insole_electrode_v1" insole_electrode_v1 -7.5,-195 r0 top (schematic designator E211)
E210 "Insole_electrode_v1" insole_electrode_v1 0,-195 r0 top (schematic designator E212)
E211 "Insole_electrode_v1" insole_electrode_v1 7.5,-195 r0 top (schematic designator E213)
E212 "Insole_electrode_v1" insole_electrode_v1 15,-195 r0 top (schematic designator E214)
E213 "Insole_electrode_v1" insole_electrode_v1 22.5,-195 r0 top (schematic designator E215)
E214 "Insole_electrode_v1" insole_electrode_v1 30,-195 r0 top (schematic designator E216)
E215 "Insole_electrode_v1" insole_electrode_v1 -15,-202.5 r0 top (schematic designator E217)
E216 "Insole_electrode_v1" insole_electrode_v1 -7.5,-202.5 r0 top (schematic designator E218)
E217 "Insole_electrode_v1" insole_electrode_v1 0,-202.5 r0 top (schematic designator E219)
E218 "Insole_electrode_v1" insole_electrode_v1 7.5,-202.5 r0 top (schematic designator E220)
E219 "Insole_electrode_v1" insole_electrode_v1 15,-202.5 r0 top (schematic designator E221)
E220 "Insole_electrode_v1" insole_electrode_v1 22.5,-202.5 r0 top (schematic designator E222)
E221 "Insole_electrode_v1" insole_electrode_v1 30,-202.5 r0 top (schematic designator E223)
E222 "Insole_electrode_v1" insole_electrode_v1 -15,-210 r0 top (schematic designator E224)
E223 "Insole_electrode_v1" insole_electrode_v1 -7.5,-210 r0 top (schematic designator E225)
E224 "Insole_electrode_v1" insole_electrode_v1 0,-210 r0 top (schematic designator E226)
E225 "Insole_electrode_v1" insole_electrode_v1 7.5,-210 r0 top (schematic designator E227)
E226 "Insole_electrode_v1" insole_electrode_v1 15,-210 r0 top (schematic designator E228)
E227 "Insole_electrode_v1" insole_electrode_v1 22.5,-210 r0 top (schematic designator E229)
E228 "Insole_electrode_v1" insole_electrode_v1 30,-210 r0 top (schematic designator E230)
E229 "Insole_electrode_v1" insole_electrode_v1 -15,-217.5 r0 top (schematic designator E231)
E230 "Insole_electrode_v1" insole_electrode_v1 -7.5,-217.5 r0 top (schematic designator E232)
E231 "Insole_electrode_v1" insole_electrode_v1 0,-217.5 r0 top (schematic designator E233)
E232 "Insole_electrode_v1" insole_electrode_v1 7.5,-217.5 r0 top (schematic designator E234)
E233 "Insole_electrode_v1" insole_electrode_v1 15,-217.5 r0 top (schematic designator E235)
E234 "Insole_electrode_v1" insole_electrode_v1 22.5,-217.5 r0 top (schematic designator E236)
E235 "Insole_electrode_v1" insole_electrode_v1 30,-217.5 r0 top (schematic designator E237)
E236 "Insole_electrode_v1" insole_electrode_v1 -15,-225 r0 top (schematic designator E238)
E237 "Insole_electrode_v1" insole_electrode_v1 -7.5,-225 r0 top (schematic designator E239)
E238 "Insole_electrode_v1" insole_electrode_v1 0,-225 r0 top (schematic designator E240)
E239 "Insole_electrode_v1" insole_electrode_v1 7.5,-225 r0 top (schematic designator E241)
E240 "Insole_electrode_v1" insole_electrode_v1 15,-225 r0 top (schematic designator E242)
E241 "Insole_electrode_v1" insole_electrode_v1 22.5,-225 r0 top (schematic designator E243)
E242 "Insole_electrode_v1" insole_electrode_v1 30,-225 r0 top (schematic designator E244)
E243 "Insole_electrode_v1" insole_electrode_v1 -7.5,-232.5 r0 top (schematic designator E246)
E244 "Insole_electrode_v1" insole_electrode_v1 0,-232.5 r0 top (schematic designator E247)
E245 "Insole_electrode_v1" insole_electrode_v1 7.5,-232.5 r0 top (schematic designator E248)
E246 "Insole_electrode_v1" insole_electrode_v1 15,-232.5 r0 top (schematic designator E249)
E247 "Insole_electrode_v1" insole_electrode_v1 22.5,-232.5 r0 top (schematic designator E250)
E248 "Insole_electrode_v1" insole_electrode_v1 30,-232.5 r0 top (schematic designator E251)
E249 "Insole_electrode_v1" insole_electrode_v1 -7.5,-240 r0 top (schematic designator E252)
E250 "Insole_electrode_v1" insole_electrode_v1 0,-240 r0 top (schematic designator E253)
E251 "Insole_electrode_v1" insole_electrode_v1 7.5,-240 r0 top (schematic designator E254)
E252 "Insole_electrode_v1" insole_electrode_v1 15,-240 r0 top (schematic designator E255)
E254 "Insole_electrode_v1" insole_electrode_v1 22.5,-240 r0 top (schematic designator E256)
Insole_ver1_chi "Comment" XF2M42151A -100.2,-182.6 r270 top

## Footprints (in the part's own frame and the unit in brackets; to place one, negate y for a bottom-side part, rotate by r counter-clockwise, add the part's x,y. Pads: shape width x height; smd on the part's side, far side on the other; paste and mask are expansions set on the pad)
insole_electrode_v1 [mm]
  round 1 hole 0.25: 0(0,0)
  round 0.5 hole 0.25: 1(0,-1.524) 1(0,1.524)
  Top Layer circle w0.5: c0,0 r1.54
XF2M42151A [mm]
  rect 0.25x1.1 smd far side: 1(-10,0) 2(-9.5,0) 3(-9,0) 4(-8.5,0) 5(-8,0) 6(-7.5,0) 7(-7,0) 8(-6.5,0) 9(-6,0) 10(-5.5,0) 11(-5,0) 12(-4.5,0) 13(-4,0) 14(-3.5,0) 15(-3,0) 16(-2.5,0) 17(-2,0) 18(-1.5,0) 19(-1,0) 20(-0.5,0) 21(0,0) 22(0.5,0) 23(1,0) 24(1.5,0) 25(2,0) 26(2.5,0) 27(3,0) 28(3.5,0) 29(4,0) 30(4.5,0) 31(5,0) 32(5.5,0) 33(6,0) 34(6.5,0) 35(7,0) 36(7.5,0) 37(8,0) 38(8.5,0) 39(9,0) 40(9.5,0) 41(10,0) 42(10.5,0)
  rect 1.7x1.5 smd far side: MP1(-11.65,-3.9) MP2(12.15,-3.9)
  silkscreen extent -12,-4.88 12.5,0.9

## Part data
E1 E2 E3 E4 E5 E6 E7 E8 E9 E10 E11 E12 E13 E14 E15 E16 E17 E18 E19 E20 E21 E22 E23 E24 E25 E26 E27 E28 E29 E30 E31 E32 E33 E34 E35 E36 E37 E38 E39 E40 E41 E42 E43 E44 E45 E46 E47 E48 E49 E50 E51 E52 E53 E54 E55 E56 E57 E58 E59 E60 E61 E62 E63 E64 E65 E66 E67 E68 E69 E70 E71 E72 E73 E74 E75 E76 E77 E78 E79 E80 E81 E82 E83 E84 E85 E86 E87 E88 E89 E90 E91 E92 E93 E94 E95 E96 E97 E98 E99 E100 E101 E102 E103 E104 E105 E106 E107 E108 E109 E110 E111 E112 E113 E114 E115 E116 E117 E118 E119 E120 E121 E122 E123 E124 E125 E126 E127 E128 E129 E130 E131 E132 E133 E134 E135 E136 E137 E138 E139 E140 E141 E142 E143 E144 E145 E146 E147 E148 E149 E150 E151 E152 E153 E154 E155 E156 E157 E158 E159 E160 E161 E162 E163 E164 E165 E166 E167 E168 E169 E170 E171 E172 E173 E174 E175 E176 E177 E178 E179 E180 E181 E182 E183 E184 E185 E186 E187 E188 E189 E190 E191 E192 E193 E194 E195 E196 E197 E198 E199 E200 E201 E202 E203 E204 E205 E206 E207 E208 E209 E210 E211 E212 E213 E214 E215 E216 E217 E218 E219 E220 E221 E222 E223 E224 E225 E226 E227 E228 E229 E230 E231 E232 E233 E234 E235 E236 E237 E238 E239 E240 E241 E242 E243 E244 E245 E246 E247 E248 E249 E250 E251 E252 E254: library part CMP-065-000001-1, Component Type=Standard, Design Item ID=Insole_electrode_v1, Pin Count=2, Source="Sheet1_sensor_mat_inso_v1 1.SCHLIB"

## Nets (pads, with @x,y where several pads share a name; then routed paths per layer and width w, separated by ;. In a path a pad name is that pad's centre, name@x,y a point inside that pad or via, vN(x,y) a via of type N, cw(c..) or ccw(c..) an arc to the next point about the centre after c; other vN are vias at no path point)
Col1: E17.1 E33.1 E42.1 E60.1 E71.1 E82.1 E92.1 E102.1 E112.1 E122.1 E131.1 E140.1 E141.1 E148.1 E155.1 E162.1 E163.1 E169.1 E175.1 E181.1 E193.1 E200.1 E201.1 E208.1 E215.1 E222.1 E229.1 E236.1 E237.1 E243.1 E249.1 E250.1 Insole_ver1_chi.33 | length 329.1
  Bottom Layer w0.254: Insole_ver1_chi.33@-100.2,-188.6 -29.1,-188.6 -19.654,-198.046 -19.654,-198.822 -19.645,-198.831 -19.645,-215.685 -17.822,-217.507 -17.822,-226.989 -9.256,-235.556 -9.256,-241.347 -8.092,-242.511 -0.987,-242.511 E250.1@0,-241.524
  Bottom Layer w0.5: E140.1@-30,-121.524 -25.548,-121.524 E141.1@-22.5,-118.476 ; E140.1@-30,-118.476 E131.1@-30,-114.024 ; E131.1@-30,-110.976 E122.1@-30,-106.524 ; E122.1@-30,-103.476 E112.1@-30,-99.024 ; E112.1@-30,-95.976 E102.1@-30,-91.524 ; E102.1@-30,-88.476 E92.1@-30,-84.024 ; E92.1@-30,-80.976 E82.1@-30,-76.524 ; E82.1@-30,-73.476 E71.1@-30,-69.024 ; E71.1@-30,-65.976 E60.1@-30,-61.524 ; E60.1@-30,-58.476 -30,-54.024 E42.1@-22.5,-46.524 ; E200.1@-22.5,-189.024 -18.048,-189.024 E201.1@-15,-185.976 ; E200.1@-22.5,-185.976 E193.1@-22.5,-181.524 ; E193.1@-22.5,-178.476 -22.5,-175.7 -15,-168.2 E181.1@-15,-166.524 ; E162.1@-22.5,-144.024 -18.048,-144.024 E163.1@-15,-140.976 ; E162.1@-22.5,-140.976 E155.1@-22.5,-136.524 ; E155.1@-22.5,-133.476 E148.1@-22.5,-129.024 ; E148.1@-22.5,-125.976 E141.1@-22.5,-121.524 ; E42.1@-22.5,-43.476 E33.1@-22.5,-39.024 ; E33.1@-22.5,-35.976 -22.5,-31.524 E17.1@-15,-24.024 ; E236.1@-15,-226.524 -10.548,-226.524 E237.1@-7.5,-223.476 ; E236.1@-15,-223.476 E229.1@-15,-219.024 ; E229.1@-15,-215.976 E222.1@-15,-211.524 ; E222.1@-15,-208.476 E215.1@-15,-204.024 ; E215.1@-15,-200.976 E208.1@-15,-196.524 ; E208.1@-15,-193.476 E201.1@-15,-189.024 ; E175.1@-15,-155.976 E169.1@-15,-151.524 ; E169.1@-15,-148.476 E163.1@-15,-144.024 ; E249.1@-7.5,-241.524 -5.624,-241.524 -2.576,-238.476 E250.1@0,-238.476 ; E249.1@-7.5,-238.476 E243.1@-7.5,-234.024 ; E243.1@-7.5,-230.976 E237.1@-7.5,-226.524
Col2: E5.1 E25.1 E34.1 E51.1 E61.1 E72.1 E83.1 E93.1 E103.1 E113.1 E123.1 E132.1 E133.1 E142.1 E149.1 E156.1 E157.1 E164.1 E170.1 E176.1 E187.1 E194.1 E195.1 E202.1 E209.1 E216.1 E223.1 E230.1 E231.1 E238.1 E244.1 E245.1 Insole_ver1_chi.34 | length 352.9
  Bottom Layer w0.254: Insole_ver1_chi.34@-100.2,-189.1 -99.4,-189.1 -29.103,-189.1 -20.009,-198.194 -20.009,-215.823 -18.178,-217.654 -18.178,-227.136 -9.611,-235.703 -9.611,-241.495 -8.24,-242.866 0.634,-242.866 2.4,-241.1
  Bottom Layer w0.5: E132.1@-22.5,-114.024 -19.452,-110.976 E133.1@-15,-110.976 ; E132.1@-22.5,-110.976 E123.1@-22.5,-106.524 ; E123.1@-22.5,-103.476 E113.1@-22.5,-99.024 ; E113.1@-22.5,-95.976 E103.1@-22.5,-91.524 ; E103.1@-22.5,-88.476 E93.1@-22.5,-84.024 ; E93.1@-22.5,-80.976 E83.1@-22.5,-76.524 ; E83.1@-22.5,-73.476 E72.1@-22.5,-69.024 ; E72.1@-22.5,-65.976 E61.1@-22.5,-61.524 ; E61.1@-22.5,-58.476 E51.1@-22.5,-54.024 ; E51.1@-22.5,-50.976 -22.5,-48.5 -15,-41 E34.1@-15,-39.024 ; E194.1@-15,-181.524 -12.726,-179.25 -9.75,-179.25 -8.976,-178.476 E195.1@-7.5,-178.476 ; E194.1@-15,-178.476 E187.1@-15,-174.024 ; E187.1@-15,-170.976 -15,-169.5 -7.5,-162 E176.1@-7.5,-159.024 ; E156.1@-15,-136.524 -10.548,-136.524 E157.1@-7.5,-133.476 ; E156.1@-15,-133.476 E149.1@-15,-129.024 ; E149.1@-15,-125.976 E142.1@-15,-121.524 ; E142.1@-15,-118.476 E133.1@-15,-114.024 ; E34.1@-15,-35.976 E25.1@-15,-31.524 ; E25.1@-15,-28.476 -15,-25.75 -11.25,-22 -11.25,-12.774 E5.1@-7.5,-9.024 ; E230.1@-7.5,-219.024 -3.048,-219.024 E231.1@0,-215.976 ; E230.1@-7.5,-215.976 E223.1@-7.5,-211.524 ; E223.1@-7.5,-208.476 E216.1@-7.5,-204.024 ; E216.1@-7.5,-200.976 E209.1@-7.5,-196.524 ; E209.1@-7.5,-193.476 E202.1@-7.5,-189.024 ; E202.1@-7.5,-185.976 E195.1@-7.5,-181.524 ; E176.1@-7.5,-155.976 E170.1@-7.5,-151.524 ; E170.1@-7.5,-148.476 E164.1@-7.5,-144.024 ; E164.1@-7.5,-140.976 E157.1@-7.5,-136.524 ; E244.1@0,-234.024 1.776,-234.024 4.824,-230.976 E245.1@7.5,-230.976 ; E244.1@0,-230.976 E238.1@0,-226.524 ; E238.1@0,-223.476 E231.1@0,-219.024 ; 2.4,-241.1 2.4,-239.8 7.5,-234.7 E245.1@7.5,-234.024
Col3: E11.1 E18.1 E26.1 E43.1 E52.1 E62.1 E73.1 E84.1 E94.1 E104.1 E114.1 E124.1 E125.1 E134.1 E143.1 E150.1 E151.1 E158.1 E165.1 E171.1 E182.1 E188.1 E189.1 E196.1 E203.1 E210.1 E217.1 E224.1 E225.1 E232.1 E239.1 E251.1 Insole_ver1_chi.35 | length 335.3
  Bottom Layer w0.254: Insole_ver1_chi.35@-100.2,-189.6 -99.3,-189.6 -99.275,-189.625 -29.081,-189.625 -20.365,-198.341 -20.365,-215.97 -18.534,-217.802 -18.534,-227.284 -9.967,-235.851 -9.967,-241.642 -8.387,-243.222 5.802,-243.222 E251.1@7.5,-241.524
  Bottom Layer w0.5: E124.1@-15,-106.524 -11.952,-103.476 E125.1@-7.5,-103.476 ; E124.1@-15,-103.476 E114.1@-15,-99.024 ; E114.1@-15,-95.976 E104.1@-15,-91.524 ; E104.1@-15,-88.476 E94.1@-15,-84.024 ; E94.1@-15,-80.976 E84.1@-15,-76.524 ; E84.1@-15,-73.476 E73.1@-15,-69.024 ; E73.1@-15,-65.976 E62.1@-15,-61.524 ; E62.1@-15,-58.476 E52.1@-15,-54.024 ; E52.1@-15,-50.976 E43.1@-15,-46.524 ; E43.1@-15,-43.476 -15,-42.2 -7.5,-34.7 E26.1@-7.5,-31.524 ; E188.1@-7.5,-174.024 -6.274,-174.024 -3.226,-170.976 E189.1@0,-170.976 ; E188.1@-7.5,-170.976 E182.1@-7.5,-166.524 ; E182.1@-7.5,-163.476 -4,-159.976 -4,-157.3 0,-153.3 E171.1@0,-151.524 ; E150.1@-7.5,-129.024 -3.048,-129.024 E151.1@0,-125.976 ; E150.1@-7.5,-125.976 E143.1@-7.5,-121.524 ; E143.1@-7.5,-118.476 E134.1@-7.5,-114.024 ; E134.1@-7.5,-110.976 E125.1@-7.5,-106.524 ; E26.1@-7.5,-28.476 E18.1@-7.5,-24.024 ; E18.1@-7.5,-20.976 E11.1@-7.5,-16.524 ; E224.1@0,-211.524 4.452,-211.524 E225.1@7.5,-208.476 ; E224.1@0,-208.476 E217.1@0,-204.024 ; E217.1@0,-200.976 E210.1@0,-196.524 ; E210.1@0,-193.476 E203.1@0,-189.024 ; E203.1@0,-185.976 E196.1@0,-181.524 ; E196.1@0,-178.476 E189.1@0,-174.024 ; E171.1@0,-148.476 E165.1@0,-144.024 ; E165.1@0,-140.976 E158.1@0,-136.524 ; E158.1@0,-133.476 E151.1@0,-129.024 ; E251.1@7.5,-238.476 9.2,-236.776 9.2,-228.224 E239.1@7.5,-226.524 ; E239.1@7.5,-223.476 E232.1@7.5,-219.024 ; E232.1@7.5,-215.976 E225.1@7.5,-211.524